# EAGLE board CheckBatteryVoltage12Volts (EAGLE 8.5.2)
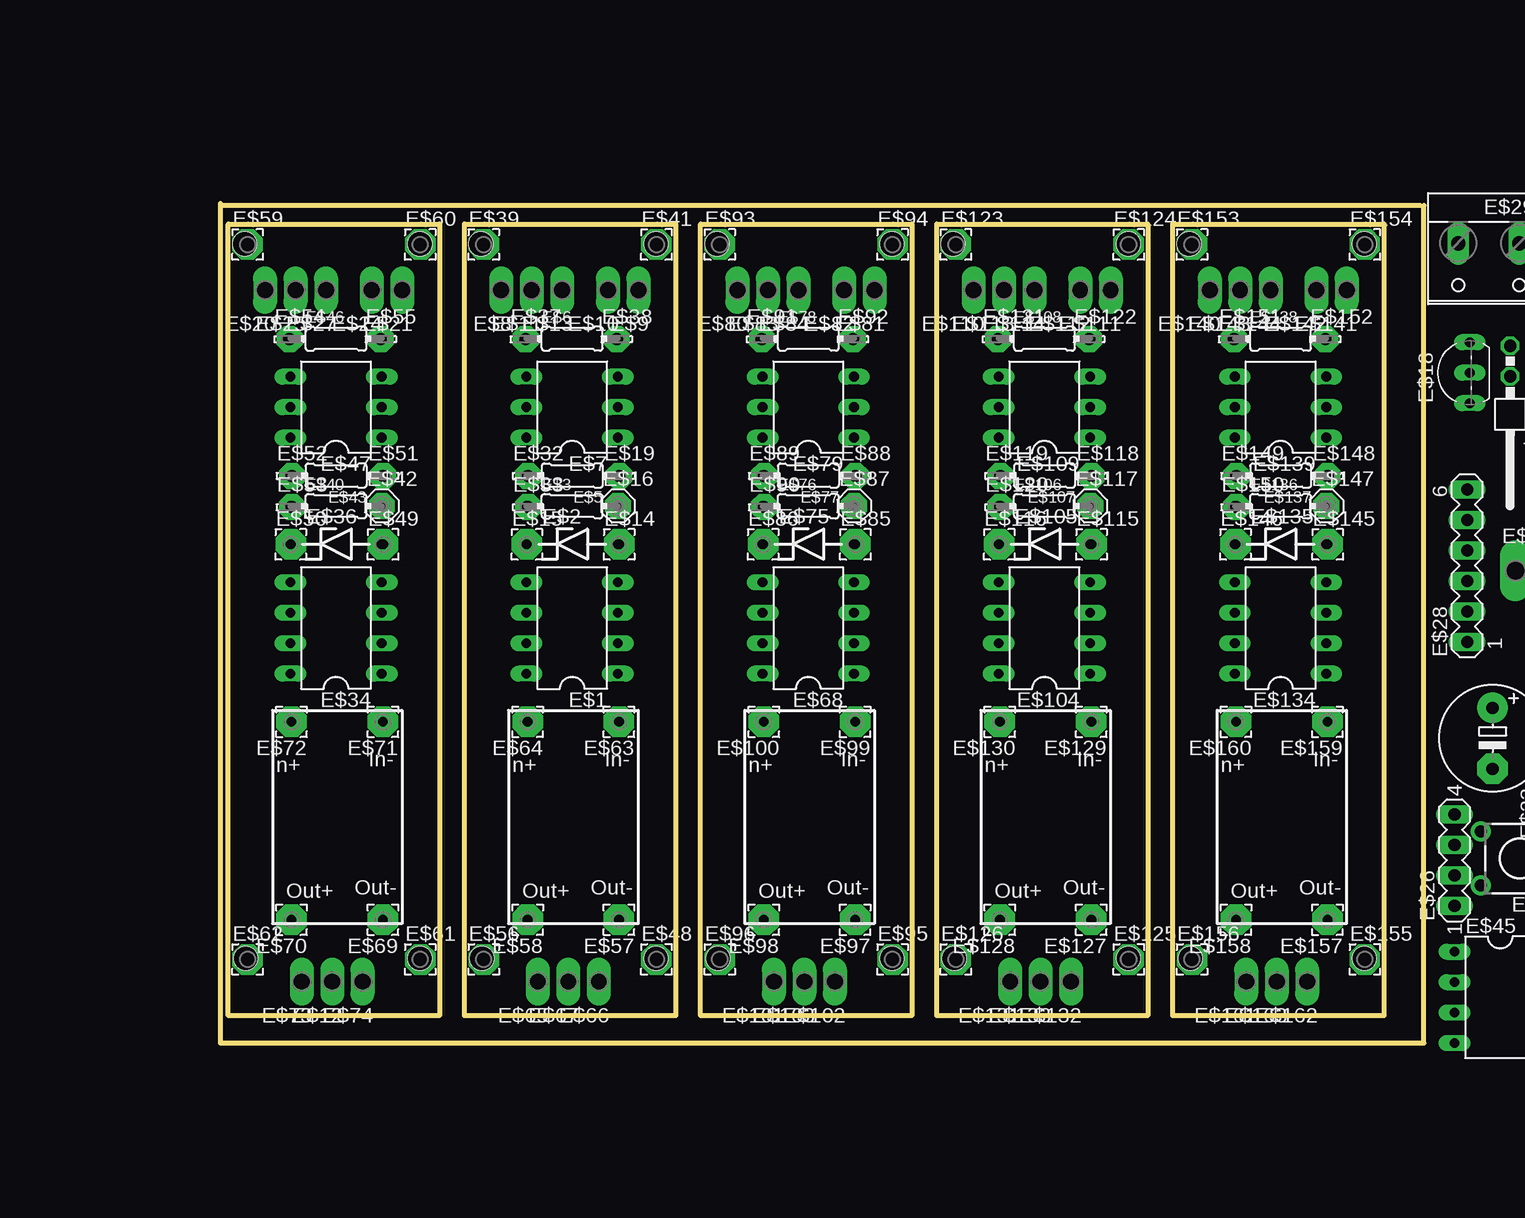
[diagram p0: board, top side]
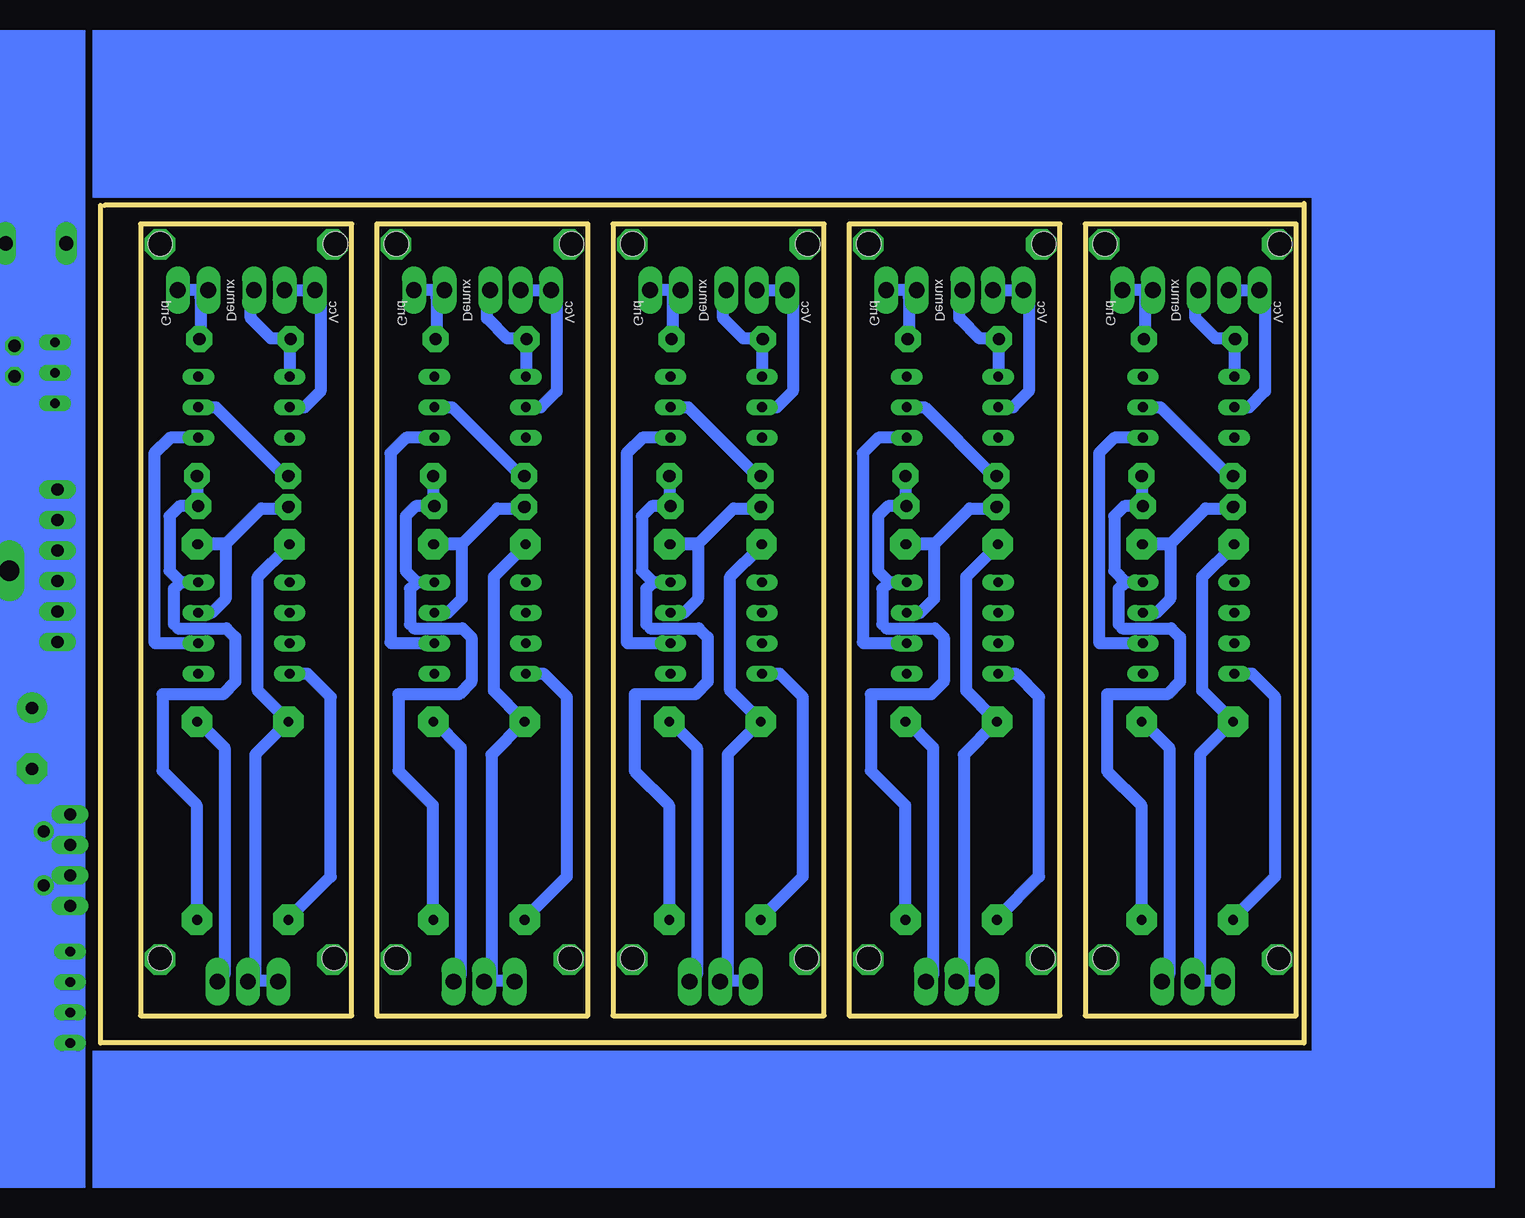
[diagram p1: board, bottom side, seen from below]

Size 100.33 x 70 mm. Coordinates in mm from the lower left corner, seen from the top.
Outline: 0,69.85 0,0 100.33,0 100.33,69.85
Outline: 0,69.85 0,70
Outline: 0,69.85 100,69.85
Outline: 0.66,68.28 18.25,68.28 18.25,2.27 0.66,2.27 0.66,68.28
Outline: 20.34,68.28 37.94,68.28 37.94,2.27 20.34,2.27 20.34,68.28
Outline: 40.02,68.28 57.62,68.28 57.62,2.27 40.02,2.27 40.02,68.28
Outline: 59.71,68.28 77.31,68.28 77.31,2.27 59.71,2.27 59.71,68.28
Outline: 79.39,68.28 97,68.28 97,2.27 79.39,2.27 79.39,68.28
Copper layers (1*16): Top 0.035mm / dielectric 1.5mm / Bottom 0.035mm
Design rules "default": minimum track width 10mil, minimum drill 24mil, track to track 8mil, track to pad 8mil, pad to pad 8mil, via to via 8mil, smd to smd 8mil, copper to edge 40mil, drill to drill 8mil, minimum pad ring 10mil, minimum via ring 8mil, stop-mask expansion 4mil, vias tented up to drill 0mil, thermal gap 10mil
Holes 2 mm at 2.12,7.07 16.62,7.07 16.62,66.62 2.02,66.62 21.8,7.07 36.3,7.07 36.3,66.62 21.7,66.62 41.48,7.07 55.99,7.07 55.99,66.62 41.38,66.62 61.17,7.07 75.67,7.07 75.67,66.62 61.07,66.62 80.86,7.07 95.36,7.07 95.36,66.62 80.75,66.62

## Footprints (pad centres in the part's own frame; a part is rotated, then mirrored left to right if it is on the bottom)
DIL08 = drill 0.813 long: 1 -3.81,-3.81; 2 -1.27,-3.81; 3 1.27,-3.81; 4 3.81,-3.81; 5 3.81,3.81; 6 1.27,3.81; 7 -1.27,3.81; 8 -3.81,3.81
ZDIO-7.5 = drill 0.813 octagon: A 3.81,0; C -3.81,0
0204/7 = drill 0.813 octagon: 1 -3.81,0; 2 3.81,0
TL1105 = drill 1 pad 1.676: 1 -2.25,3.25; 2 2.25,3.25; 3 -2.25,-3.25; 4 2.25,-3.25
DIL06 = drill 0.813 long: 1 -2.54,-3.81; 2 0,-3.81; 3 2.54,-3.81; 4 2.54,3.81; 5 0,3.81; 6 -2.54,3.81
P1-13Y = drill 1.321 pad 1.905 long: TP 0,0
2,54/0,8 = drill 0.813 pad 2.54 octagon: 1 0,0
MCS10B = drill 1.016 pad 2.159 octagon: MP 0,0
TO92- = drill 0.813 long: 1 2.54,0; 2 0,0; 3 -2.54,0
LSP10 = drill 1.016 pad 2.159 octagon: MP 0,0
1X01/90 = drill 1.016 long: 1 -1.27,-3.81
E5-8,5 = drill 1.016 pad 2.54: + -2.54,0 | drill 1.016 pad 2.54 octagon: - 2.54,0
MA04-1 = drill 1.016 long: 1 -3.81,0; 2 -1.27,0; 3 1.27,0; 4 3.81,0
MA06-1 = drill 1.016 long: 1 -6.35,0; 2 -3.81,0; 3 -1.27,0; 4 1.27,0; 5 3.81,0; 6 6.35,0
W237-132 = drill 1.194 long: 1 -2.54,-0.635; 2 2.54,-0.635
RS-2,5 = drill 0.813 pad 1.6 octagon: 1 -1.27,0; 2 1.27,0
2X02/90 = drill 1.016 octagon: 1 -1.27,-6.35; 2 -1.27,-3.81; 3 1.27,-6.35; 4 1.27,-3.81
P1-17Y = drill 1.702 pad 2.121 long: TP 0,0

## Placement (x,y rotation side)
E$1  Attiny85  [DIL08]  29.32,34.6 90 top
E$2  zener 2.4  [ZDIO-7.5]  29.32,41.59 0 top
E$3  1k  [0204/7]  29.32,44.76 0 top
E$4  [TL1105]  108.32,15.38 90 top  (outside the outline)
E$5  220  [0204/7]  29.32,47.3 180 top
E$6  220  [0204/7]  29.32,58.73 0 top
E$7  Til113  [DIL06]  29.32,53.02 90 top
E$8  [P1-13Y]  23.41,62.77 180 top
E$9  [P1-13Y]  34.84,62.77 180 top
E$10  [P1-13Y]  32.3,62.77 180 top
E$11  [P1-13Y]  25.95,62.77 180 top
E$12  [P1-13Y]  9.31,5.12 180 top
E$13  [P1-13Y]  28.49,62.77 180 top
E$14  [2,54/0,8]  33.24,41.58 0 top
E$15  [2,54/0,8]  25.55,41.58 0 top
E$16  [MCS10B]  33.14,44.77 0 top
E$17  [0204/7]  113.03,25.4 90 top  (outside the outline)
E$18  [TO92-]  104.14,55.88 90 top  (outside the outline)
E$19  [LSP10]  33.24,47.27 0 top
E$20  [P1-13Y]  3.73,62.77 180 top
E$21  [P1-13Y]  15.15,62.77 180 top
E$22  [1X01/90]  112.39,40.01 180 top  (outside the outline)
E$23  [E5-8,5]  106.05,25.4 270 top  (outside the outline)
E$24  [P1-13Y]  12.62,62.77 180 top
E$25  [P1-13Y]  6.26,62.77 180 top
E$26  [MA04-1]  102.87,15.24 90 top
E$27  [P1-13Y]  8.8,62.77 180 top
E$28  [MA06-1]  103.93,39.79 90 top  (outside the outline)
E$29  [W237-132]  105.73,66.04 180 top
E$30  [RS-2,5]  113.03,50.8 90 top  (outside the outline)
E$31  [2X02/90]  108.78,51.77 180 top  (outside the outline)
E$32  [LSP10]  25.64,47.27 0 top
E$33  [LSP10]  25.64,44.67 0 top
E$34  Attiny85  [DIL08]  9.63,34.6 90 top
E$35  [MA04-1]  114.3,13.34 90 top  (outside the outline)
E$36  zener 2.4  [ZDIO-7.5]  9.63,41.59 0 top
E$37  [LSP10]  25.44,58.67 0 top
E$38  [LSP10]  33.04,58.67 0 top
E$39  [2,54/0,8]  21.94,66.58 0 top
E$40  1k  [0204/7]  9.63,44.76 0 top
E$41  [2,54/0,8]  36.34,66.58 0 top
E$42  [MCS10B]  13.46,44.77 0 top
E$43  220  [0204/7]  9.63,47.3 180 top
E$44  [P1-17Y]  107.95,39.37 0 top  (outside the outline)
E$45  [DIL08]  106.68,3.81 270 top
E$46  220  [0204/7]  9.63,58.73 0 top
E$47  Til113  [DIL06]  9.63,53.02 90 top
E$48  [2,54/0,8]  36.34,6.97 0 top
E$49  [2,54/0,8]  13.55,41.58 0 top
E$50  [2,54/0,8]  5.87,41.58 0 top
E$51  [LSP10]  13.55,47.27 0 top
E$52  [LSP10]  5.96,47.27 0 top
E$53  [LSP10]  5.96,44.67 0 top
E$54  [LSP10]  5.75,58.67 0 top
E$55  [LSP10]  13.36,58.67 0 top
E$56  [2,54/0,8]  21.94,6.97 0 top
E$57  [2,54/0,8]  33.23,10.27 180 top
E$58  [2,54/0,8]  25.61,10.27 180 top
E$59  [2,54/0,8]  2.25,66.58 0 top
E$60  [2,54/0,8]  16.66,66.58 0 top
E$61  [2,54/0,8]  16.66,6.97 0 top
E$62  [2,54/0,8]  2.25,6.97 0 top
E$63  [2,54/0,8]  33.23,26.78 180 top
E$64  [2,54/0,8]  25.61,26.78 180 top
E$65  [P1-13Y]  26.46,5.12 180 top
E$66  [P1-13Y]  31.54,5.12 180 top
E$67  [P1-13Y]  29,5.12 180 top
E$68  Attiny85  [DIL08]  49.01,34.6 90 top
E$69  [2,54/0,8]  13.54,10.27 180 top
E$70  [2,54/0,8]  5.92,10.27 180 top
E$71  [2,54/0,8]  13.54,26.78 180 top
E$72  [2,54/0,8]  5.92,26.78 180 top
E$73  [P1-13Y]  6.77,5.12 180 top
E$74  [P1-13Y]  11.85,5.12 180 top
E$75  zener 2.4  [ZDIO-7.5]  49.01,41.59 0 top
E$76  1k  [0204/7]  49.01,44.76 0 top
E$77  220  [0204/7]  49.01,47.3 180 top
E$78  220  [0204/7]  49.01,58.73 0 top
E$79  Til113  [DIL06]  49.01,53.02 90 top
E$80  [P1-13Y]  43.09,62.77 180 top
E$81  [P1-13Y]  54.52,62.77 180 top
E$82  [P1-13Y]  51.98,62.77 180 top
E$83  [P1-13Y]  45.63,62.77 180 top
E$84  [P1-13Y]  48.17,62.77 180 top
E$85  [2,54/0,8]  52.92,41.58 0 top
E$86  [2,54/0,8]  45.23,41.58 0 top
E$87  [MCS10B]  52.83,44.77 0 top
E$88  [LSP10]  52.92,47.27 0 top
E$89  [LSP10]  45.33,47.27 0 top
E$90  [LSP10]  45.33,44.67 0 top
E$91  [LSP10]  45.12,58.67 0 top
E$92  [LSP10]  52.73,58.67 0 top
E$93  [2,54/0,8]  41.62,66.58 0 top
E$94  [2,54/0,8]  56.02,66.58 0 top
E$95  [2,54/0,8]  56.02,6.97 0 top
E$96  [2,54/0,8]  41.62,6.97 0 top
E$97  [2,54/0,8]  52.91,10.27 180 top
E$98  [2,54/0,8]  45.29,10.27 180 top
E$99  [2,54/0,8]  52.91,26.78 180 top
E$100  [2,54/0,8]  45.29,26.78 180 top
E$101  [P1-13Y]  46.14,5.12 180 top
E$102  [P1-13Y]  51.22,5.12 180 top
E$103  [P1-13Y]  48.68,5.12 180 top
E$104  Attiny85  [DIL08]  68.69,34.6 90 top
E$105  zener 2.4  [ZDIO-7.5]  68.69,41.59 0 top
E$106  1k  [0204/7]  68.69,44.76 0 top
E$107  220  [0204/7]  68.69,47.3 180 top
E$108  220  [0204/7]  68.69,58.73 0 top
E$109  Til113  [DIL06]  68.69,53.02 90 top
E$110  [P1-13Y]  62.78,62.77 180 top
E$111  [P1-13Y]  74.21,62.77 180 top
E$112  [P1-13Y]  71.67,62.77 180 top
E$113  [P1-13Y]  65.32,62.77 180 top
E$114  [P1-13Y]  67.86,62.77 180 top
E$115  [2,54/0,8]  72.61,41.58 0 top
E$116  [2,54/0,8]  64.92,41.58 0 top
E$117  [MCS10B]  72.51,44.77 0 top
E$118  [LSP10]  72.61,47.27 0 top
E$119  [LSP10]  65.01,47.27 0 top
E$120  [LSP10]  65.01,44.67 0 top
E$121  [LSP10]  64.81,58.67 0 top
E$122  [LSP10]  72.41,58.67 0 top
E$123  [2,54/0,8]  61.31,66.58 0 top
E$124  [2,54/0,8]  75.71,66.58 0 top
E$125  [2,54/0,8]  75.71,6.97 0 top
E$126  [2,54/0,8]  61.31,6.97 0 top
E$127  [2,54/0,8]  72.6,10.27 180 top
E$128  [2,54/0,8]  64.98,10.27 180 top
E$129  [2,54/0,8]  72.6,26.78 180 top
E$130  [2,54/0,8]  64.98,26.78 180 top
E$131  [P1-13Y]  65.83,5.12 180 top
E$132  [P1-13Y]  70.91,5.12 180 top
E$133  [P1-13Y]  68.37,5.12 180 top
E$134  Attiny85  [DIL08]  88.38,34.6 90 top
E$135  zener 2.4  [ZDIO-7.5]  88.38,41.59 0 top
E$136  1k  [0204/7]  88.38,44.76 0 top
E$137  220  [0204/7]  88.38,47.3 180 top
E$138  220  [0204/7]  88.38,58.73 0 top
E$139  Til113  [DIL06]  88.38,53.02 90 top
E$140  [P1-13Y]  82.47,62.77 180 top
E$141  [P1-13Y]  93.89,62.77 180 top
E$142  [P1-13Y]  91.36,62.77 180 top
E$143  [P1-13Y]  85,62.77 180 top
E$144  [P1-13Y]  87.55,62.77 180 top
E$145  [2,54/0,8]  92.3,41.58 0 top
E$146  [2,54/0,8]  84.61,41.58 0 top
E$147  [MCS10B]  92.19,44.77 0 top
E$148  [LSP10]  92.3,47.27 0 top
E$149  [LSP10]  84.69,47.27 0 top
E$150  [LSP10]  84.69,44.67 0 top
E$151  [LSP10]  84.5,58.67 0 top
E$152  [LSP10]  92.09,58.67 0 top
E$153  [2,54/0,8]  81,66.58 0 top
E$154  [2,54/0,8]  95.39,66.58 0 top
E$155  [2,54/0,8]  95.39,6.97 0 top
E$156  [2,54/0,8]  81,6.97 0 top
E$157  [2,54/0,8]  92.28,10.27 180 top
E$158  [2,54/0,8]  84.66,10.27 180 top
E$159  [2,54/0,8]  92.28,26.78 180 top
E$160  [2,54/0,8]  84.66,26.78 180 top
E$161  [P1-13Y]  85.51,5.12 180 top
E$162  [P1-13Y]  90.59,5.12 180 top
E$163  [P1-13Y]  88.05,5.12 180 top

## Library data of the parts
E$1 E$34 E$45 E$68 E$104 E$134 = 74xx-us
E$2 E$23 E$36 E$75 E$105 E$135 = ref-packages-longpad
E$3 E$5 E$6 E$17 E$40 E$43 E$46 E$76-E$78 E$106-E$108 E$136-E$138 = eagle-ltspice
E$4 = switch
E$7 E$47 E$79 E$109 E$139 = ic-package
E$8-E$13 E$20 E$21 E$24 E$25 E$27 E$44 E$65-E$67 E$73 E$74 E$80-E$84 E$101-E$103 E$110-E$114 E$131-E$133 E$140-E$144 E$161-E$163 = testpad
E$14 E$15 E$39 E$41 E$48-E$50 E$56-E$64 E$69-E$72 E$85 E$86 E$93-E$100 E$115 E$116 E$123-E$130 E$145 E$146 E$153-E$160 = wirepad
E$16 E$19 E$32 E$33 E$37 E$38 E$42 E$51-E$55 E$87-E$92 E$117-E$122 E$147-E$152 = solpad
E$18 = transistor-fet
E$22 E$31 = pinhead
E$26 E$28 E$35 = con-lstb
E$29 = con-wago-508
E$30 = discrete

## Nets
0V: E$71.1 E$74.TP
0V1: E$63.1 E$66.TP
0V2: E$99.1 E$102.TP
0V3: E$129.1 E$132.TP
0V4: E$159.1 E$162.TP
12V: E$12.TP E$36.C E$72.1 E$73.TP
12V1: E$2.C E$64.1 E$65.TP E$67.TP
12V2: E$75.C E$100.1 E$101.TP E$103.TP
12V3: E$105.C E$130.1 E$131.TP E$133.TP
12V4: E$135.C E$160.1 E$161.TP E$163.TP
B+: E$34.8 E$70.1
B+1: E$1.8 E$58.1
B+2: E$68.8 E$98.1
B+3: E$104.8 E$128.1
B+4: E$134.8 E$158.1
B-: E$34.4 E$40.2 E$43.1 E$69.1
B-1: E$1.4 E$3.2 E$5.1 E$57.1
B-2: E$68.4 E$76.2 E$77.1 E$97.1
B-3: E$104.4 E$106.2 E$107.1 E$127.1
B-4: E$134.4 E$136.2 E$137.1 E$157.1
S$2: E$6.2 E$9.TP E$10.TP
S$3: E$1.2 E$7.1
S$4: E$5.2 E$7.2
S$5: E$6.1 E$7.4 E$13.TP
S$7: E$8.TP E$11.TP
S$8: E$7.5
S$9: E$47.5
S$10: E$78.2 E$81.TP E$82.TP
S$11: E$68.2 E$79.1
S$12: E$77.2 E$79.2
S$13: E$78.1 E$79.4 E$84.TP
S$14: E$80.TP E$83.TP
S$15: E$79.5
S$16: E$108.2 E$111.TP E$112.TP
S$17: E$104.2 E$109.1
S$18: E$107.2 E$109.2
S$19: E$108.1 E$109.4 E$114.TP
S$20: E$110.TP E$113.TP
S$21: E$109.5
S$22: E$138.2 E$141.TP E$142.TP
S$23: E$134.2 E$139.1
S$24: E$137.2 E$139.2
S$25: E$138.1 E$139.4 E$144.TP
S$26: E$140.TP E$143.TP
S$27: E$139.5
S$28: E$34.3 E$36.A E$40.1
S$29: E$1.3 E$2.A E$3.1
S$30: E$68.3 E$75.A E$76.1
S$31: E$104.3 E$105.A E$106.1
S$32: E$21.TP E$24.TP E$46.2
S$33: E$20.TP E$25.TP
S$34: E$134.3 E$135.A E$136.1
S$40: E$34.2 E$47.1
S$41: E$43.2 E$47.2
S$44: E$27.TP E$46.1 E$47.4

## Tracks (layer width: path | path; a pad name or v marks a point on that pad's centre or on a via)
0V
  Bottom 0.254: 13.35,26.71 E$71.1
  Bottom 1.016: 13.35,26.71 11.25,24.61 11.25,5.72 E$74.TP
0V1
  Bottom 0.254: 33.04,26.71 E$63.1
  Bottom 1.016: 33.04,26.71 30.94,24.61 30.94,5.72 E$66.TP
0V2
  Bottom 0.254: 52.72,26.71 E$99.1
  Bottom 1.016: 52.72,26.71 50.62,24.61 50.62,5.72 E$102.TP
0V3
  Bottom 0.254: 72.41,26.71 E$129.1
  Bottom 1.016: 72.41,26.71 70.31,24.61 70.31,5.72 E$132.TP
0V4
  Bottom 0.254: 92.09,26.71 E$159.1
  Bottom 1.016: 92.09,26.71 89.99,24.61 89.99,5.72 E$162.TP
12V
  Bottom 0.254: 9.24,5.22 8.69,5.22 | 7.64,5.22 6.95,5.22 E$73.TP | 6.04,41.32 6.04,41.57 E$36.C | 6.04,26.94 E$72.1 6.04,26.71
  Bottom 1.016: 9.24,5.22 E$12.TP | 6.04,41.32 8.49,38.87 8.49,29.39 6.04,26.94 | 6.04,26.71 8.69,24.06 8.69,5.22 7.64,5.22 E$73.TP
12V1
  Bottom 0.254: 28.92,5.22 28.37,5.22 | 27.32,5.22 26.64,5.22 E$65.TP | 25.72,41.32 25.72,41.57 E$2.C | 25.72,26.94 E$64.1 25.72,26.71
  Bottom 1.016: 28.92,5.22 E$67.TP | 25.72,41.32 28.17,38.87 28.17,29.39 25.72,26.94 | 25.72,26.71 28.37,24.06 28.37,5.22 27.32,5.22 E$65.TP
12V2
  Bottom 0.254: 48.61,5.22 48.06,5.22 | 47.01,5.22 46.32,5.22 E$101.TP | 45.41,41.32 45.41,41.57 E$75.C | 45.41,26.94 E$100.1 45.41,26.71
  Bottom 1.016: 48.61,5.22 E$103.TP | 45.41,41.32 47.86,38.87 47.86,29.39 45.41,26.94 | 45.41,26.71 48.06,24.06 48.06,5.22 47.01,5.22 E$101.TP
12V3
  Bottom 0.254: 68.29,5.22 67.74,5.22 | 66.69,5.22 66.01,5.22 E$131.TP | 65.09,41.32 65.09,41.57 E$105.C | 65.09,26.94 E$130.1 65.09,26.71
  Bottom 1.016: 68.29,5.22 E$133.TP | 65.09,41.32 67.54,38.87 67.54,29.39 65.09,26.94 | 65.09,26.71 67.74,24.06 67.74,5.22 66.69,5.22 E$131.TP
12V4
  Bottom 0.254: 87.98,5.22 87.43,5.22 | 86.38,5.22 85.69,5.22 E$161.TP | 84.78,41.32 84.78,41.57 E$135.C | 84.78,26.94 E$160.1 84.78,26.71
  Bottom 1.016: 87.98,5.22 E$163.TP | 84.78,41.32 87.23,38.87 87.23,29.39 84.78,26.94 | 84.78,26.71 87.43,24.06 87.43,5.22 86.38,5.22 E$161.TP
B+
  Bottom 0.254: 5.81,10.48 E$70.1
  Bottom 1.016: E$34.8 4.36,30.79 2.41,28.84 2.41,13.88 5.81,10.48
B+1
  Bottom 0.254: 25.49,10.48 E$58.1
  Bottom 1.016: E$1.8 24.04,30.79 22.09,28.84 22.09,13.88 25.49,10.48
B+2
  Bottom 0.254: 45.18,10.48 E$98.1
  Bottom 1.016: E$68.8 43.73,30.79 41.78,28.84 41.78,13.88 45.18,10.48
B+3
  Bottom 0.254: 64.86,10.48 E$128.1
  Bottom 1.016: E$104.8 63.41,30.79 61.46,28.84 61.46,13.88 64.86,10.48
B+4
  Bottom 0.254: 84.55,10.48 E$158.1
  Bottom 1.016: E$134.8 83.09,30.79 81.15,28.84 81.15,13.88 84.55,10.48
B-
  Bottom 0.254: 15.48,34.9 15.15,34.58 | 13.58,10.48 E$69.1
  Bottom 1.016: E$43.1 13.49,47.08 13.49,44.79 E$40.2 15,44.76 15.84,43.92 15.84,39.37 14.88,38.41 | E$34.4 14.88,38.41 | 13.58,10.48 13.58,19.85 16.43,22.7 16.43,29.07 11.4,29.07 10.36,30.12 10.36,33.83 11.11,34.58 15.15,34.58 | 15.48,34.9 15.48,37.86 14.88,38.41
B-1
  Bottom 0.254: 35.16,34.9 34.84,34.58 | 33.27,10.48 E$57.1
  Bottom 1.016: E$5.1 33.18,47.08 33.18,44.79 E$3.2 34.69,44.76 35.52,43.92 35.52,39.37 34.57,38.41 | E$1.4 34.57,38.41 | 33.27,10.48 33.27,19.85 36.12,22.7 36.12,29.07 31.09,29.07 30.04,30.12 30.04,33.83 30.79,34.58 34.84,34.58 | 35.16,34.9 35.16,37.86 34.57,38.41
B-2
  Bottom 0.254: 54.85,34.9 54.52,34.58 | 52.95,10.48 E$97.1
  Bottom 1.016: E$77.1 52.87,47.08 52.87,44.79 E$76.2 54.37,44.76 55.21,43.92 55.21,39.37 54.25,38.41 | E$68.4 54.25,38.41 | 52.95,10.48 52.95,19.85 55.8,22.7 55.8,29.07 50.77,29.07 49.73,30.12 49.73,33.83 50.48,34.58 54.52,34.58 | 54.85,34.9 54.85,37.86 54.25,38.41
B-3
  Bottom 0.254: 74.53,34.9 74.21,34.58 | 72.64,10.48 E$127.1
  Bottom 1.016: E$107.1 72.55,47.08 72.55,44.79 E$106.2 74.06,44.76 74.89,43.92 74.89,39.37 73.94,38.41 | E$104.4 73.94,38.41 | 72.64,10.48 72.64,19.85 75.48,22.7 75.48,29.07 70.46,29.07 69.41,30.12 69.41,33.83 70.16,34.58 74.21,34.58 | 74.53,34.9 74.53,37.86 73.94,38.41
B-4
  Bottom 0.254: 94.22,34.9 93.89,34.58 | 92.32,10.48 E$157.1
  Bottom 1.016: E$137.1 92.23,47.08 92.23,44.79 E$136.2 93.74,44.76 94.58,43.92 94.58,39.37 93.62,38.41 | E$134.4 93.62,38.41 | 92.32,10.48 92.32,19.85 95.17,22.7 95.17,29.07 90.14,29.07 89.09,30.12 89.09,33.83 89.84,34.58 93.89,34.58 | 94.22,34.9 94.22,37.86 93.62,38.41
S$2
  Bottom 0.254: E$10.TP 32.31,62.79 32.35,62.83
  Bottom 1.016: E$9.TP 32.95,62.77 32.95,62.15 | 32.95,62.15 32.31,62.79 | 32.95,62.15 32.95,58.74 E$6.2
S$3
  Bottom 1.016: E$1.2 33.15,33.35 36.71,33.35 36.79,33.42 36.79,49.17 35.48,50.48 E$7.1
S$4
  Bottom 1.016: E$7.2 31.67,53.02 25.96,47.31 25.64,47.31 E$5.2
S$5
  Bottom 0.254: 28.75,62.6 28.92,62.6 E$13.TP
  Bottom 1.016: E$6.1 25.5,58.72 25.5,55.57 E$7.4 | 25.64,58.74 E$6.1 | E$6.1 27.06,58.73 28.75,60.43 28.75,62.51 E$13.TP | 28.75,62.54 28.75,62.6 28.75,62.62
S$7
  Bottom 1.016: E$11.TP E$8.TP
S$8
  Bottom 1.016: 23.16,62.77 22.95,62.56 22.95,54.34 24.27,53.02 E$7.5
S$9
  Bottom 1.016: 3.47,62.77 3.26,62.56 3.26,54.34 4.59,53.02 E$47.5
S$10
  Bottom 0.254: E$82.TP 52,62.79 52.04,62.83
  Bottom 1.016: E$81.TP 52.64,62.77 52.64,62.15 | 52.64,62.15 52,62.79 | 52.64,62.15 52.64,58.74 E$78.2
S$11
  Bottom 1.016: E$68.2 52.83,33.35 56.4,33.35 56.47,33.42 56.47,49.17 55.17,50.48 E$79.1
S$12
  Bottom 1.016: E$79.2 51.36,53.02 45.65,47.31 45.32,47.31 E$77.2
S$13
  Bottom 0.254: 48.44,62.6 48.61,62.6 E$84.TP
  Bottom 1.016: E$78.1 45.18,58.72 45.18,55.57 E$79.4 | 45.32,58.74 E$78.1 | E$78.1 46.74,58.73 48.44,60.43 48.44,62.51 E$84.TP | 48.44,62.54 48.44,62.6 48.44,62.62
S$14
  Bottom 1.016: E$83.TP E$80.TP
S$15
  Bottom 1.016: 42.84,62.77 42.63,62.56 42.63,54.34 43.96,53.02 E$79.5
S$16
  Bottom 0.254: E$112.TP 71.68,62.79 71.72,62.83
  Bottom 1.016: E$111.TP 72.32,62.77 72.32,62.15 | 72.32,62.15 71.68,62.79 | 72.32,62.15 72.32,58.74 E$108.2
S$17
  Bottom 1.016: E$104.2 72.52,33.35 76.08,33.35 76.16,33.42 76.16,49.17 74.86,50.48 E$109.1
S$18
  Bottom 1.016: E$109.2 71.04,53.02 65.33,47.31 65.01,47.31 E$107.2
S$19
  Bottom 0.254: 68.12,62.6 68.29,62.6 E$114.TP
  Bottom 1.016: E$108.1 64.87,58.72 64.87,55.57 E$109.4 | 65.01,58.74 E$108.1 | E$108.1 66.43,58.73 68.12,60.43 68.12,62.51 E$114.TP | 68.12,62.54 68.12,62.6 68.12,62.62
S$20
  Bottom 1.016: E$113.TP E$110.TP
S$21
  Bottom 1.016: 62.53,62.77 62.31,62.56 62.31,54.34 63.64,53.02 E$109.5
S$22
  Bottom 0.254: E$142.TP 91.37,62.79 91.41,62.83
  Bottom 1.016: E$141.TP 92.01,62.77 92.01,62.15 | 92.01,62.15 91.37,62.79 | 92.01,62.15 92.01,58.74 E$138.2
S$23
  Bottom 1.016: E$134.2 92.2,33.35 95.77,33.35 95.84,33.42 95.84,49.17 94.54,50.48 E$139.1
S$24
  Bottom 1.016: E$139.2 90.73,53.02 85.02,47.31 84.69,47.31 E$137.2
S$25
  Bottom 0.254: 87.81,62.6 87.98,62.6 E$144.TP
  Bottom 1.016: E$138.1 84.55,58.72 84.55,55.57 E$139.4 | 84.69,58.74 E$138.1 | E$138.1 86.11,58.73 87.81,60.43 87.81,62.51 E$144.TP | 87.81,62.54 87.81,62.6 87.81,62.62
S$26
  Bottom 1.016: E$143.TP E$140.TP
S$27
  Bottom 1.016: 82.21,62.77 82,62.56 82,54.34 83.33,53.02 E$139.5
S$28
  Bottom 1.016: E$40.1 5.95,44.56 8.19,44.56 11.06,41.69 E$36.A 11.17,41.59 11.17,37.04 12.33,35.87 E$34.3
S$29
  Bottom 1.016: E$3.1 25.64,44.56 27.88,44.56 30.75,41.69 E$2.A 30.85,41.59 30.85,37.04 32.02,35.87 E$1.3
S$30
  Bottom 1.016: E$76.1 45.32,44.56 47.56,44.56 50.44,41.69 E$75.A 50.54,41.59 50.54,37.04 51.7,35.87 E$68.3
S$31
  Bottom 1.016: E$106.1 65.01,44.56 67.25,44.56 70.12,41.69 E$105.A 70.22,41.59 70.22,37.04 71.39,35.87 E$104.3
S$32
  Bottom 0.254: E$24.TP 12.63,62.79 12.67,62.83
  Bottom 1.016: E$21.TP 13.27,62.77 13.27,62.15 | 13.27,62.15 12.63,62.79 | 13.27,62.15 13.27,58.74 E$46.2
S$33
  Bottom 1.016: E$25.TP E$20.TP
S$34
  Bottom 1.016: E$136.1 84.69,44.56 86.93,44.56 89.81,41.69 E$135.A 89.91,41.59 89.91,37.04 91.07,35.87 E$134.3
S$40
  Bottom 1.016: E$34.2 13.46,33.35 17.03,33.35 17.1,33.42 17.1,49.17 15.8,50.48 E$47.1
S$41
  Bottom 1.016: E$47.2 11.99,53.02 6.28,47.31 5.95,47.31 E$43.2
S$44
  Bottom 0.254: 9.07,62.6 9.24,62.6 E$27.TP
  Bottom 1.016: E$46.1 5.81,58.72 5.81,55.57 E$47.4 | 5.95,58.74 E$46.1 | E$46.1 7.37,58.73 9.07,60.43 9.07,62.51 E$27.TP | 9.07,62.54 9.07,62.6 9.07,62.62
(copper drawn outside any net)
  shapes: Bottom area x4

## Text on the board
tPlace: In+ | In+ | In+ | In+ | In+ | In- | In- | In- | In- | In- | Out+ | Out- | Out+ | Out- | Out+ | Out- | Out+ | Out- | Out+ | Out-
bPlace: Vcc | Demux | Gnd | Vcc | Demux | Gnd | Vcc | Demux | Gnd | Vcc | Demux | Gnd | Vcc | Demux | Gnd